# EAGLE board BISMILLAH PCG (EAGLE 9.6.2)
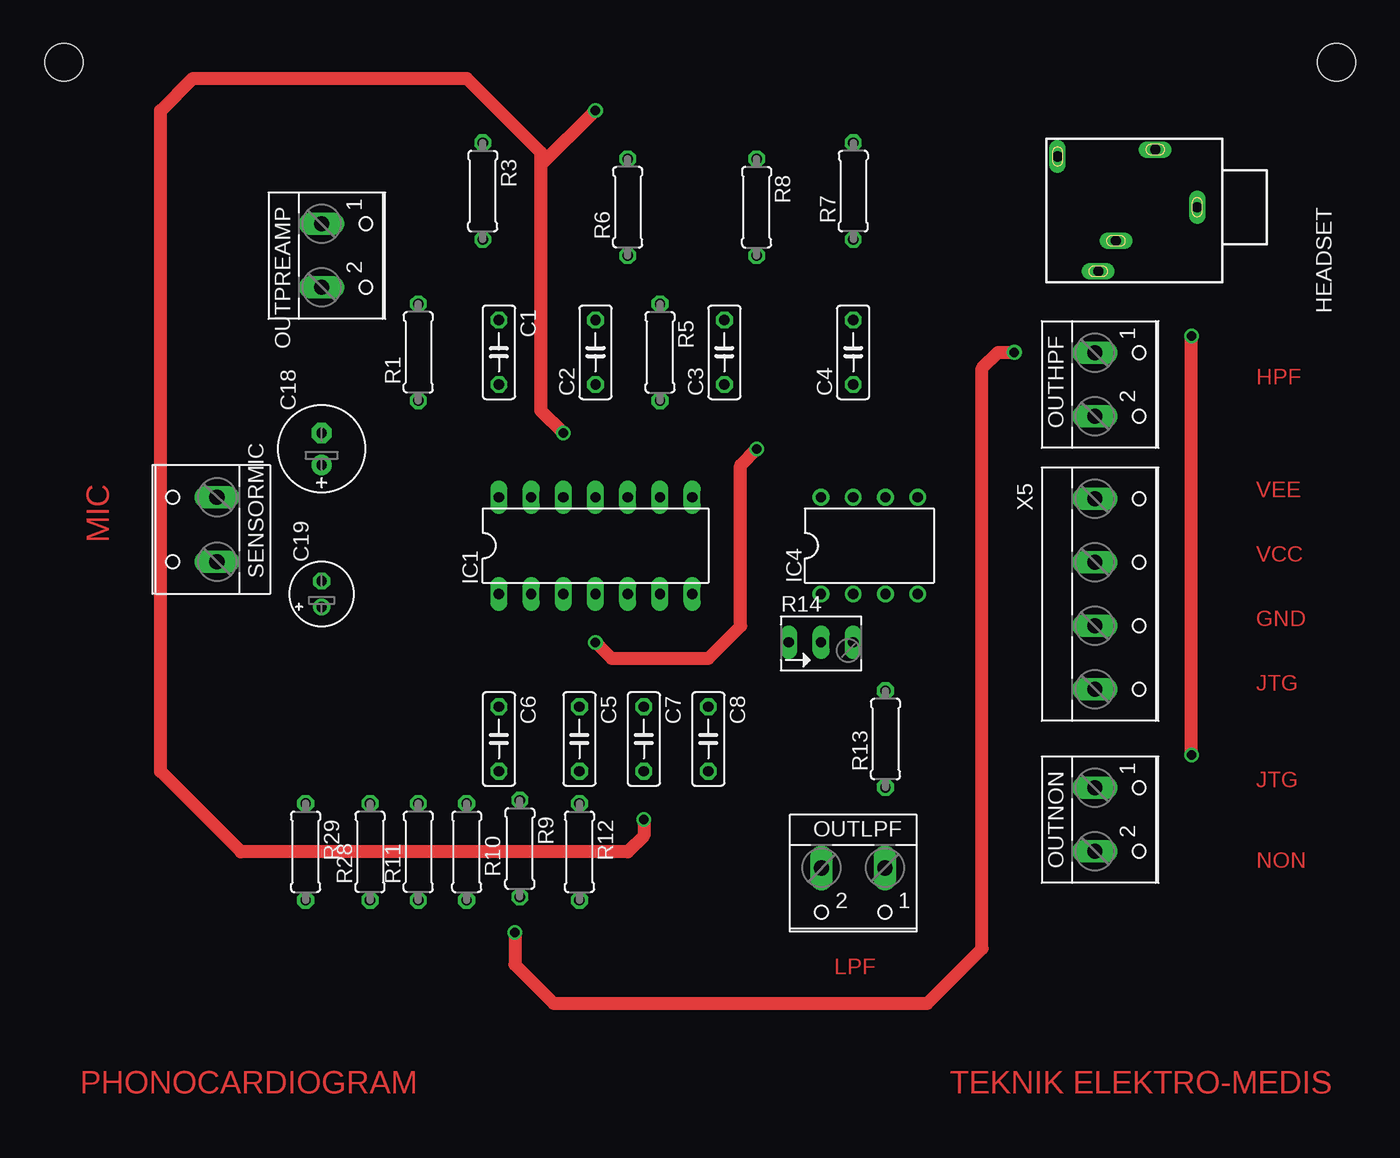
[diagram p0: board, top side]
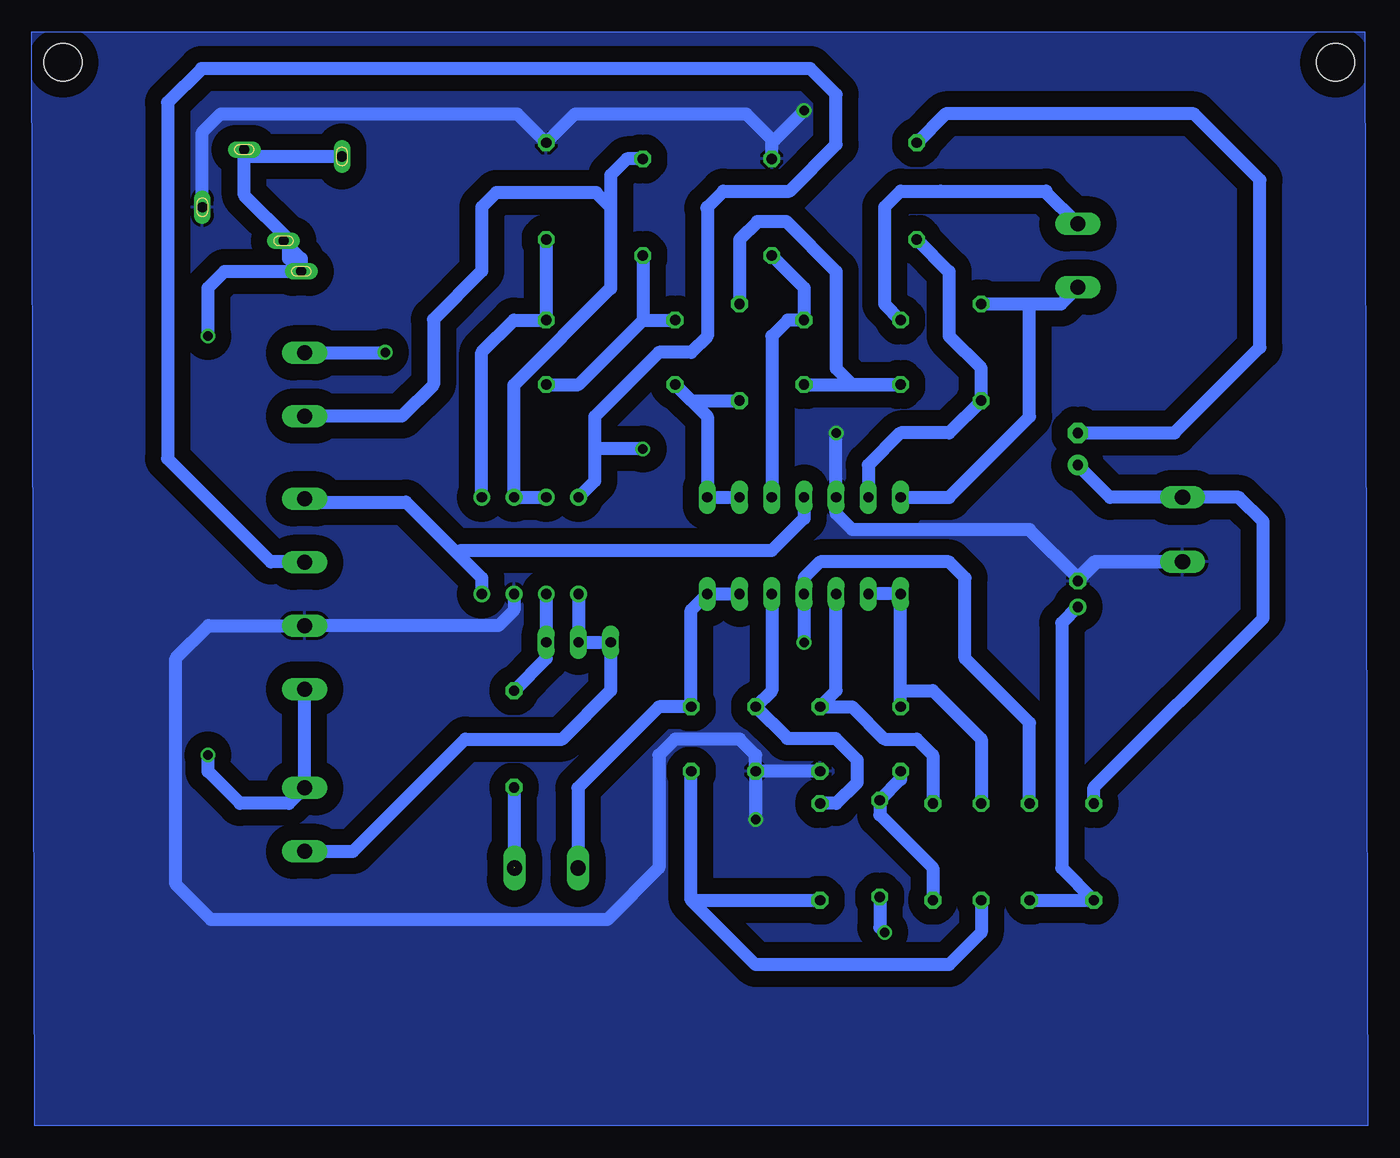
[diagram p1: board, bottom side, seen from below]

No outline drawn. Coordinates in mm, seen from the top.
Copper layers (1*16): Top 0.035mm / dielectric 1.5mm / Bottom 0.035mm
Design rules "default": minimum track width 6mil, minimum drill 0.35mm, track to track 6mil, track to pad 6mil, pad to pad 6mil, via to via 6mil, smd to smd 6mil, copper to edge 40mil, drill to drill 6mil, minimum pad ring 10mil, minimum via ring 8mil, stop-mask expansion 4mil, vias tented up to drill 0mil, thermal gap 10mil
Holes 3 mm at -1.27,83.82 99.06,83.82

## Footprints (pad centres in the part's own frame; a part is rotated, then mirrored left to right if it is on the bottom)
C050-025X075 = drill 0.813 octagon: 1 -2.54,0; 2 2.54,0
E2,5-7 = drill 0.813 pad 1.6: + -1.27,0 | drill 0.813 pad 1.6 octagon: - 1.27,0
E2-5 = drill 0.813 pad 1.27: + -1.016,0 | drill 0.813 pad 1.27 octagon: - 1.016,0
1503_09 = drill 0.8 pad 1.2 long: 1 0,-2.1; 2 -4.55,-5.4; 3 5.05,-9.9; 4 -4,-13.1; 5 2.65,-8.5
DIL14 = drill 0.813 long: 1 -7.62,-3.81; 2 -5.08,-3.81; 3 -2.54,-3.81; 4 0,-3.81; 5 2.54,-3.81; 6 5.08,-3.81; 7 7.62,-3.81; 8 7.62,3.81; 9 5.08,3.81; 10 2.54,3.81; 11 0,3.81; 12 -2.54,3.81; 13 -5.08,3.81; 14 -7.62,3.81
DIL08 = drill 0.813 pad 1.27: 1 -3.81,-3.81; 2 -1.27,-3.81; 3 1.27,-3.81; 4 3.81,-3.81; 5 3.81,3.81; 6 1.27,3.81; 7 -1.27,3.81; 8 -3.81,3.81
W237-102 = drill 1.194 long: 1 -2.5,-1.27; 2 2.5,-1.27
0207/7 = drill 0.813 octagon: 1 -3.81,0; 2 3.81,0
B64Y = drill 0.813 long: A 2.54,0; E -2.54,0; S 0,0
W237-132 = drill 1.194 long: 1 -2.54,-0.635; 2 2.54,-0.635
W237-4 = drill 1.194 long: 1 -7.5,-1.27; 2 -2.5,-1.27; 3 2.5,-1.27; 4 7.5,-1.27

## Placement (x,y rotation side)
C1  100nf  [C050-025X075]  33.02,60.96 270 top
C2  100nf  [C050-025X075]  40.64,60.96 90 top
C3  100nf  [C050-025X075]  50.8,60.96 90 top
C4  100nf  [C050-025X075]  60.96,60.96 90 top
C5  68nf  [C050-025X075]  39.37,30.48 270 top
C6  68nf  [C050-025X075]  33.02,30.48 270 top
C7  68nf  [C050-025X075]  44.45,30.48 270 top
C8  68nf  [C050-025X075]  49.53,30.48 270 top
C18  470uf  [E2,5-7]  19.05,53.34 90 top
C19  47uf  [E2-5]  19.05,41.91 90 top
HEADSET  headset  [1503_09]  90.17,72.39 270 top
IC1  TL084P  [DIL14]  40.64,45.72 0 top
IC4  TL082P  [DIL08]  62.23,45.72 0 top
OUTHPF  [W237-102]  81.28,58.42 270 top
OUTLPF  [W237-102]  60.96,19.05 180 top
OUTNON  [W237-102]  81.28,24.13 270 top
OUTPREAMP  [W237-102]  20.32,68.58 270 top
R1  10k  [0207/7]  26.67,60.96 90 top
R3  1k  [0207/7]  31.75,73.66 270 top
R5  47k  [0207/7]  45.72,60.96 270 top
R6  47k  [0207/7]  43.18,72.39 90 top
R7  47k  [0207/7]  60.96,73.66 90 top
R8  47k  [0207/7]  53.34,72.39 270 top
R9  27k  [0207/7]  34.67,21.84 270 top
R10  27k  [0207/7]  30.48,21.59 270 top
R11  27k  [0207/7]  26.67,21.59 90 top
R12  27k  [0207/7]  39.37,21.59 270 top
R13  1k  [0207/7]  63.5,30.48 90 top
R14  500k  [B64Y]  58.42,38.1 0 top
R28  1k  [0207/7]  22.86,21.59 90 top
R29  1k  [0207/7]  17.78,21.59 270 top
SENSORMIC  [W237-132]  10.16,46.99 90 top
X5  [W237-4]  81.28,41.91 270 top

## Library data of the parts
C1-C8 C18 C19 = rcl; SPICEPREFIX: C
HEADSET = con-lumberg; OC_FARNELL: 1243244; OC_NEWARK: unknown
IC1 = linear
IC4 = linear; DATA_SHEET: <a href="http://www.ti.com/lit/ds/symlink/tl084a.pdf"> Data sheet </a>
OUTHPF OUTLPF OUTNON OUTPREAMP = con-wago-500; MPN: 237-102; OC_FARNELL: unknown; OC_NEWARK: 70K9898
R1 R3 R5-R13 R28 R29 = rcl; SPICEPREFIX: R
R14 = pot
SENSORMIC = con-wago-508; OC_FARNELL: unknown; OC_NEWARK: unknown
X5 = con-wago-500; OC_FARNELL: unknown; OC_NEWARK: unknown

## Nets
GND: C5.2 C7.2 C19.- HEADSET.1 IC1.12 IC4.3 R6.2 R7.2 SENSORMIC.1 X5.3
N$1: IC1.13 R1.1 R3.2
N$2: IC1.14 OUTPREAMP.2 R1.2
N$3: C18.- R3.1
N$4: C1.1 OUTPREAMP.1
N$6: IC4.1 OUTNON.2 R14.E R14.S
N$7: C1.2 C2.1 R5.1
N$8: C2.2 IC1.10 R6.1
N$9: C3.1 IC1.8 IC1.9 R5.2
N$10: C3.2 C4.1 R8.2
N$11: C4.2 IC4.5 R7.1
N$12: IC4.6 IC4.7 OUTHPF.2 R8.1
N$13: C6.2 R9.1 R10.2
N$14: C5.1 IC1.3 R10.1
N$15: C6.1 IC1.1 IC1.2 R11.2
N$16: C8.2 R11.1 R12.2
N$17: C7.1 IC1.5 R12.1
N$18: C8.1 IC1.6 IC1.7 OUTLPF.2
N$19: IC4.2 R13.2 R14.A
N$20: OUTHPF.1 R9.2
N$23: OUTLPF.1 R13.1
N$39: C19.+ R28.1 R29.2
OUTJANTUNG: HEADSET.2 HEADSET.3 HEADSET.4 HEADSET.5 OUTNON.1 X5.4
STETOSKOP1: C18.+ R29.1 SENSORMIC.2
V-: IC1.11 IC4.4 X5.1
VCC: IC1.4 IC4.8 R28.2 X5.2

## Tracks (layer width: path | path; a pad name or v marks a point on that pad's centre or on a via)
GND  (via drill 0.75)
  Top 1.016: v38.1,54.61 36.32,56.39 36.32,75.69 | 36.32,75.69 v40.64,80.01 | v44.45,24.13 44.45,22.86 43.18,21.59 12.7,21.59 6.35,27.94 6.35,80.01 8.89,82.55 30.48,82.55 36.32,76.71 36.32,75.69
  Bottom 0: -3.56,86.22 -3.81,0 | -3.81,0 101.27,0 | 101.27,0 101.52,86.22 | 101.52,86.22 -3.56,86.22 | -3.56,86.22 -3.81,0 | -3.81,0 101.27,0 | 101.27,0 101.52,86.22 | 101.52,86.22 -3.56,86.22
  Bottom 1.016: 43.18,77.72 45.2,79.75 58.68,79.75 R7.2 63.25,79.76 86.61,79.76 88.07,78.3 HEADSET.1 | R6.2 43.18,77.72 | C5.2 C7.2 | C7.2 44.45,29.21 45.72,30.48 50.8,30.48 52.07,29.21 52.07,20.32 56.13,16.26 87.38,16.26 90.17,19.05 90.17,36.83 87.59,39.41 X5.3 64.73,39.41 63.5,40.64 IC4.3 | C19.- 17.53,44.45 SENSORMIC.1 17.78,44.45 19.05,43.18 22.86,46.99 36.83,46.99 38.1,48.26 IC1.12 v38.1,54.61 | 43.18,77.72 42.93,77.72 v40.64,80.01 | C7.2 v44.45,24.13
  pour Bottom (isolate 1.27): -3.56,86.22 -3.81,0 101.27,0 101.52,86.22
N$1
  Bottom 1.016: R3.2 29.21,67.31 29.21,62.23 26.67,59.69 R1.1 29.21,54.61 33.02,54.61 35.56,52.07 IC1.13
N$2
  Bottom 1.016: R1.2 22.86,64.77 | 22.86,64.77 22.86,55.88 29.21,49.53 IC1.14 | OUTPREAMP.2 20.36,64.77 22.86,64.77
N$3
  Bottom 1.016: R3.1 29.47,79.75 9.9,79.75 4.7,74.55 4.7,61.34 11.43,54.61 C18.-
N$4
  Bottom 1.016: C1.1 34.29,64.77 34.29,72.39 33.02,73.66 29.88,73.66 21.55,73.66 21.59,73.62 OUTPREAMP.1
N$6
  Bottom 1.016: IC4.1 R14.S R14.E 55.88,34.29 59.69,30.48 67.35,30.48 76.2,21.63 OUTNON.2
N$7
  Bottom 1.016: C2.1 C1.2 36.83,58.42 38.1,59.69 38.1,67.31 42.04,71.25 44.32,71.25 45.72,69.85 R5.1 45.85,64.9
N$8
  Bottom 1.016: R6.1 40.64,66.04 C2.2 41.91,63.5 43.18,62.23 IC1.10
N$9
  Bottom 1.016: IC1.9 IC1.8 48.26,55.88 C3.1 49.53,57.15 R5.2
N$10
  Bottom 1.016: R8.2 53.34,63.5 | 53.34,63.5 C3.2 | C4.1 58.42,58.42 53.34,63.5
N$11
  Bottom 1.016: R7.1 C4.2 63.5,63.5 66.04,60.96 IC4.5
N$12
  Bottom 1.016: IC4.7 IC4.6 63.5,58.37 55.88,65.99 55.88,72.39 | R8.1 54.61,76.2 55.88,74.93 55.88,72.39 | 55.88,72.39 57.02,73.53 64.9,73.53 66.04,72.39 66.04,67.35 69.85,63.54 69.85,58.42 72.35,55.92 OUTHPF.2
N$13
  Bottom 1.016: R10.2 30.48,20.32 34.67,24.51 R9.1 33.02,27.3 C6.2
N$14
  Bottom 1.016: IC1.3 38.1,34.29 C5.1 36.83,33.02 34.29,30.48 31.75,30.48 30.48,29.21 R10.1
N$15
  Bottom 1.016: IC1.2 IC1.1 33.02,34.29 | C6.1 33.02,34.29 | 33.02,34.29 30.48,34.29 26.67,30.48 R11.2
N$16
  Bottom 1.016: 49.53,17.78 C8.2 | 49.53,17.78 44.45,12.7 29.21,12.7 26.67,15.24 R11.1 | 49.53,17.78 R12.2
N$17
  Bottom 1.016: IC1.5 43.18,34.29 C7.1 41.96,30.53 38.15,30.53 36.45,28.83 36.45,27.05 38.1,25.4 R12.1
N$18
  Bottom 1.016: IC1.6 IC1.7 49.53,40.64 C8.1 52.07,33.02 58.46,26.63 OUTLPF.2
N$19
  Bottom 1.016: IC4.2 R14.A 60.96,36.83 R13.2
N$20  (via drill 0.75)
  Top 1.016: v34.29,15.24 34.29,12.7 37.34,9.65 66.8,9.65 71.12,13.97 71.12,59.69 72.39,60.96 v73.66,60.96
  Bottom 1.016: OUTHPF.1 73.7,60.92 v73.66,60.96 | R9.2 34.67,15.62 v34.29,15.24
N$23  (1 unrouted)
  Bottom 1.016: R13.1 63.5,20.32
N$39
  Bottom 1.016: R28.1 R29.2 20.32,20.32 20.32,39.62 C19.+
OUTJANTUNG  (via drill 0.75)
  Top 1.016: v87.63,29.21 v87.63,62.23
  Bottom 1.016: X5.4 OUTNON.1 81.24,25.4 85.09,25.4 87.63,27.94 v87.63,29.21 | HEADSET.4 84.22,76.39 HEADSET.2 84.77,73.34 81.28,69.85 81.28,68.35 HEADSET.3 | HEADSET.5 80.27,68.34 HEADSET.3 | v87.63,62.23 87.63,66.04 86.33,67.34 HEADSET.3
STETOSKOP1
  Bottom 1.016: R29.1 17.78,26.67 4.45,40.01 4.45,47.62 6.35,49.53 SENSORMIC.2 16.51,49.53 C18.+
V-
  Bottom 1.016: IC1.11 40.64,47.88 43.18,45.34 67.69,45.34 67.94,45.09 | IC4.4 66.04,43.18 67.94,45.09 | 67.94,45.09 72.01,49.15 79.75,49.15 | X5.1 79.75,49.15 | 80.39,49.15 79.75,49.15
VCC  (via drill 0.75)
  Top 1.016: v40.64,38.1 41.91,36.83 49.53,36.83 52.07,39.37 52.07,52.07 v53.34,53.34
  Bottom 1.016: IC4.8 57.15,50.8 57.15,53.34 | 48.31,72.34 48.26,72.39 | R28.2 22.86,31.75 27.94,36.83 27.94,43.18 29.21,44.45 39.37,44.45 40.64,43.18 IC1.4 v40.64,38.1 | X5.2 80.05,44.45 82.68,44.45 90.81,52.58 90.81,80.64 88.14,83.31 40.13,83.31 38.1,81.28 38.1,77.34 41.78,73.66 46.99,73.66 48.26,72.39 | 48.26,72.39 48.26,62.23 49.53,60.96 52.07,60.96 57.15,55.88 57.15,53.34 | v53.34,53.34 57.15,53.34

## Text on the board
Top: HPF | VEE | MIC | VCC | GND | JTG | JTG | NON | LPF | PHONOCARDIOGRAM | TEKNIK ELEKTRO-MEDIS